# Altium PCB PCB_mounting.PcbDoc (part 4 of 4)
Units mm, origin at the board's own origin, x right, y up, seen from the top; angles counter-clockwise.
Board outline 75 x 100 mm, 4 copper layers (Top Layer, Int1 (GND), Int2 (PWR), Bottom Layer), stack 1.586 mm thick; 145 components, 97 nets, 660 pads, 380 vias.
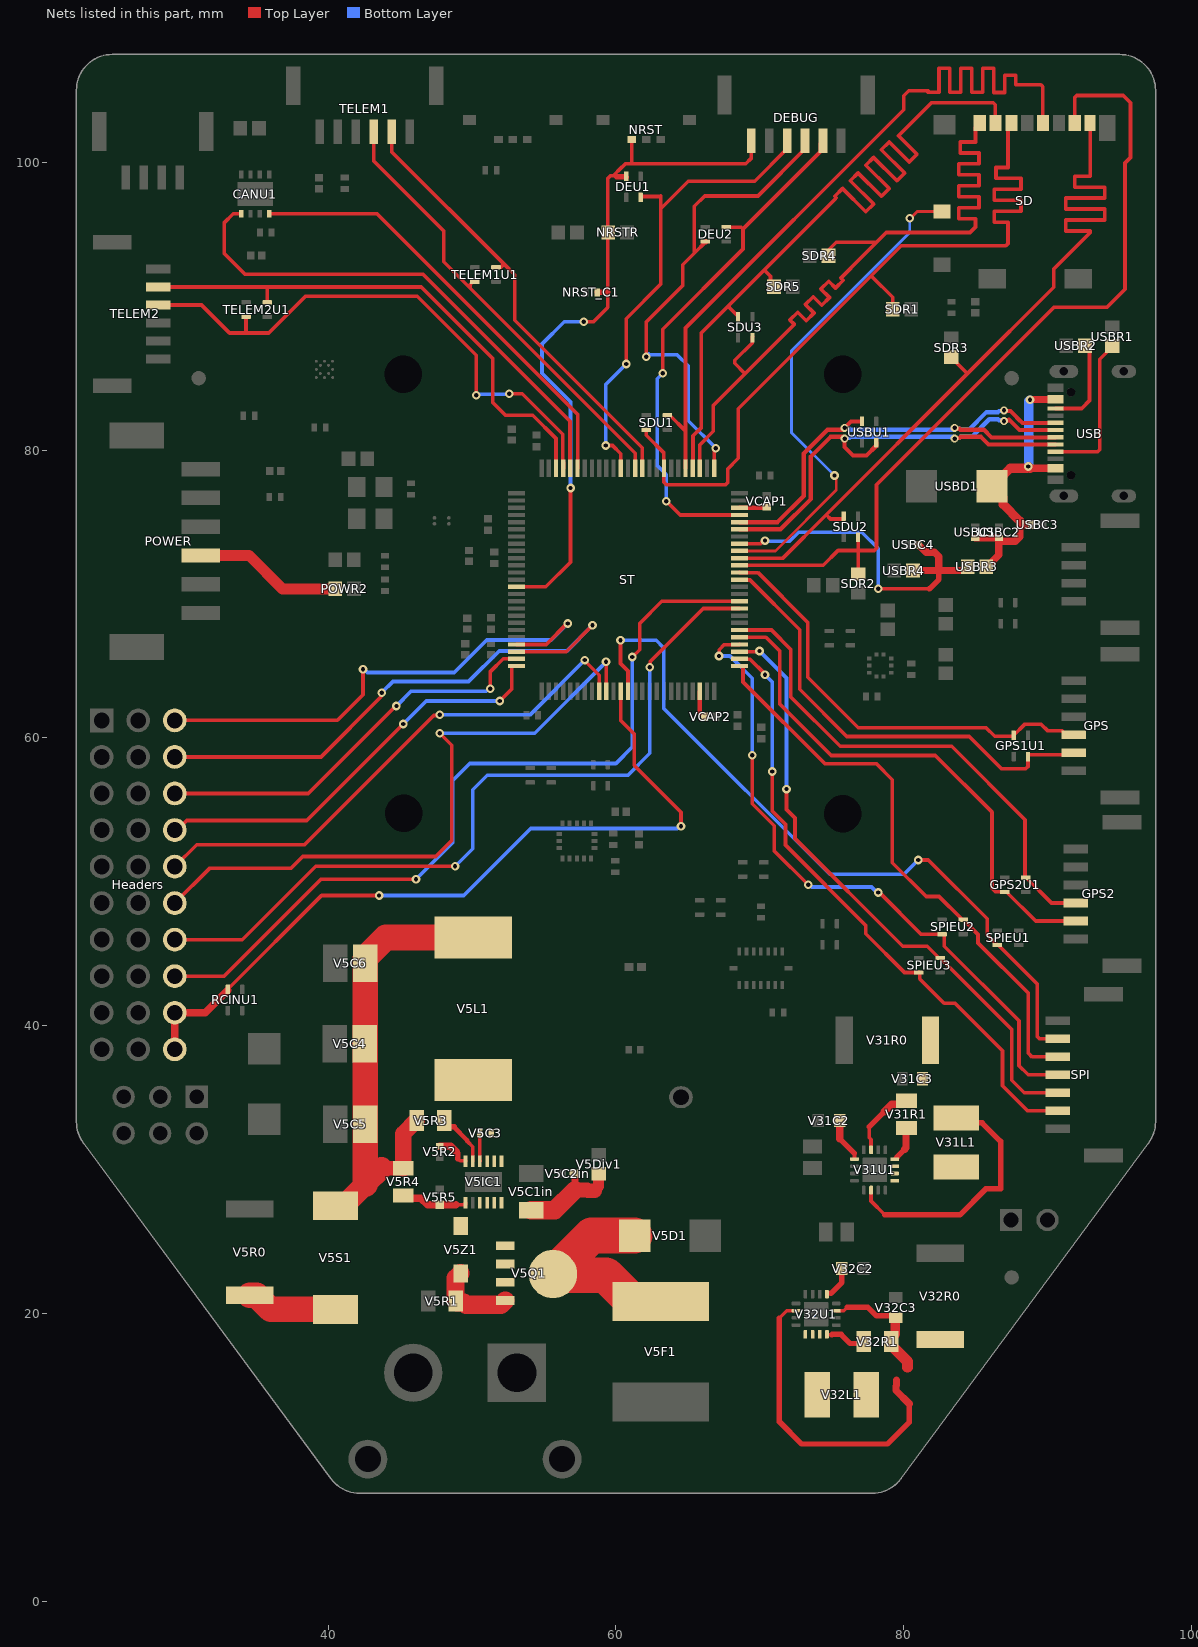
[diagram p5: the nets of this part, all layers, seen from the top]

## Via types
v1: diameter 0.6, hole 0.3, Top Layer to Bottom Layer, 358 vias
v2: diameter 0.5, hole 0.3, Top Layer to Bottom Layer, 10 vias
v3: diameter 1.27, hole 0.711, Top Layer to Bottom Layer, 6 vias
v4: diameter 0.55, hole 0.3, Top Layer to Bottom Layer, 6 vias

## Nets (pads, with @x,y where several pads share a name; then routed paths per layer and width w, separated by ;. In a path a pad name is that pad's centre, name@x,y a point inside that pad or via, vN(x,y) a via of type N, cw(c..) or ccw(c..) an arc to the next point about the centre after c; other vN are vias at no path point) (continued)
NetPOWER_4: POWER.4 POWR2.1 | length 10.3
  Top Layer w0.762: POWER.4@31.145,72.676 34.512,72.676 36.83,70.358 POWR2.1@40.498,70.358
NetST_48: ST.48 VCAP2.1 | length 1.9
  Top Layer w0.254: VCAP2.1@66.148,61.468 VCAP2.1@66.169,61.468
  Top Layer w0.3: ST.48@65.833,63.243 65.833,61.783 VCAP2.1@66.148,61.468
NetST_73: ST.73 VCAP1.1 | length 1.9
  Top Layer w0.3: ST.73@68.583,75.993 70.403,75.993 VCAP1.1@70.485,76.075
NetUSB_A4_B9: USB.A4_B9 USB.B4_A9 USBC1.1 USBC2.1 USBC3.1 USBD1.1 USBR3.1 | length 22.5
  Top Layer w0.508: USBC1.1@84.963,73.895 USBC2.1@86.614,73.895 ; USBR3.1@85.74,71.882 85.79,71.882 86.614,72.706 USBC2.1@86.614,73.895 ; v1@88.772,78.741 USB.A4_B9@90.551,78.741 ; v1(88.773,83.49) 88.799,83.515 90.525,83.515 USB.B4_A9@90.551,83.541 ; USBC3.1@88.9,74.803 88.329,74.803 88.075,75.057 88.075,74.803 88.075,73.978 87.757,73.66 86.849,73.66 USBC2.1@86.614,73.895
  Top Layer w0.635: USBD1.1@86.143,77.47 86.906,76.707 86.906,76.226 88.075,75.057 ; USBD1.1@86.143,77.52 86.906,78.283 86.956,78.283 87.406,78.733 88.537,78.733 v1(88.659,78.854) v1@88.772,78.741
  Bottom Layer w0.635: v1(88.659,78.854) 88.69,78.886 88.69,83.407 v1(88.773,83.49)
NetUSB_A5: USB.A5 USBR1.1 | length 10.7
  Top Layer w0.254: USB.A5@90.551,79.891 93.476,79.891 93.624,80.04 93.624,86.32 94.488,87.184 USBR1.1@94.488,87.234
NetUSB_B5: USB.B5 USBR2.1 | length 6.5
  Top Layer w0.254: USB.B5@90.551,82.891 92.365,82.891 92.913,83.439 92.913,86.934 USBR2.1@92.598,87.249
NetV5C1in_1: V5C1in.1 V5C2in.1 V5Div1.1 V5IC1.9 V5IC1.10 V5IC1.11 V5IC1.12 V5Q1.1 V5Q1.2 V5Q1.3 V5Z1.1 | length 7.5
  Top Layer w0.508: V5C2in.1@57.071,29.718 57.092,29.718 57.124,29.686 57.124,29.664 57.15,29.639 57.15,28.575
  Top Layer w0.762: 57.987,28.575 58.04,28.522 ; 58.505,28.522 58.801,28.818 V5Div1.1@58.801,29.703
  Top Layer w1.016: 57.15,28.575 57.987,28.575 ; 58.04,28.522 58.505,28.522
  Top Layer w1.27: V5C1in.1@54.102,27.172 55.747,27.172 57.15,28.575
NetV5C3_1: V5C3.1 V5IC1.4 | length 1.9
  Top Layer w0.254: V5C3.1@50.527,32.512 50.537,32.503 50.537,30.595 V5IC1.4@50.546,30.586
NetV5C3_2: V5C3.2 V5IC1.1 V5IC1.2 V5IC1.3 V5L1.1
NetV5C4_1: V5C4.1 V5C5.1 V5C6.1 V5L1.2 V5R3.2 V5R4.1 V5S1.2 | length 33.4
  Top Layer w1.016: 43.706,30.094 V5R4.1@45.212,30.094
  Top Layer w1.143: V5R4.1@45.212,30.094 45.212,32.491 46.122,33.401 V5R3.2@46.167,33.401
  Top Layer w1.524: V5S1.2@40.513,27.476 41.088,27.476 42.58,28.968 43.706,30.094
  Top Layer w1.778: 42.58,28.968 V5C5.1@42.58,33.147 42.562,33.164 42.562,38.718 V5C4.1@42.545,38.735 42.562,38.752 42.562,44.682 44.003,46.123 V5L1.2@50.089,46.123
NetV5D1_1: V5D1.1 V5F1.2 V5Q1.5-6-7-8 | length 15.1
  Top Layer w2.5: V5D1.1@61.304,25.4 58.293,25.4 V5Q1.5-6-7-8@55.626,22.733 55.709,22.65 59.307,22.65 61.129,20.828 V5F1.2@63.119,20.828
NetV5IC1_5: V5IC1.5 V5R3.1 | length 3.4
  Top Layer w0.254: 49.657,31.953 49.682,31.953 50.046,31.59 V5IC1.5@50.046,30.586
  Top Layer w0.3: 48.759,32.961 48.759,32.936 49.657,32.038 49.657,31.953
  Top Layer w0.381: V5R3.1@48.282,32.961 48.759,32.961
NetV5IC1_6: V5IC1.6 V5R2.1 | length 2.4
  Top Layer w0.254: 48.895,31.242 49.019,31.118 ; 49.019,30.755 49.167,30.607 49.525,30.607 V5IC1.6@49.546,30.586
  Top Layer w0.381: 49.019,30.755 49.019,31.118
  Top Layer w0.508: V5R2.1@47.752,31.623 48.514,31.623 48.895,31.242
NetV5IC1_7: V5IC1.7 V5R4.2 V5R5.1 | length 4.7
  Top Layer w0.254: 48.875,27.542 49.523,27.542 49.546,27.565 V5IC1.7@49.546,27.686
  Top Layer w0.508: V5R4.2@45.212,28.194 45.407,27.999 46.441,27.999 46.898,27.542 V5R5.1@47.752,27.542 48.875,27.542
NetV5Q1_4: V5Q1.4 V5R1.1 V5Z1.2 | length 5.8
  Top Layer w1.27: V5Z1.2@49.2,22.785 48.854,22.439 V5R1.1@48.854,20.853 48.944,20.763 49.434,20.763 49.598,20.599 52.016,20.599 V5Q1.4@52.314,20.897
NetV5R0_1: V5R0.1 V5S1.1 | length 6.4
  Top Layer w1.778: V5R0.1@34.544,21.257 35.016,21.257 35.997,20.276 V5S1.1@40.513,20.276
NetV31C2_1: V31C2.1 V31U1.9 | length 3.1
  Top Layer w0.254: V31U1.9@76.578,30.722 76.578,31.118
  Top Layer w0.381: 75.565,32.131 76.578,31.118
  Top Layer w0.508: V31C2.1@75.553,33.401 75.553,32.143 75.565,32.131
NetV31C3_1: V31C3.1 V31L1.2 V31R0.1 V31R1.2 V31U1.7 V31U1.14 | length 23.7
  Top Layer w0.254: 77.597,32.969 77.597,32.211 77.728,32.08 V31U1.7@77.728,31.372 ; V31U1.14@77.728,28.572 77.728,27.809 78.689,26.848 ; V31L1.2@83.642,33.577 V31L1.2@83.974,33.245
  Top Layer w0.381: 77.597,32.969 78.638,34.011 ; 78.689,26.848 83.896,26.848 85.7,28.651 86.741,28.651 86.741,31.953 85.449,33.245 V31L1.2@83.974,33.245
  Top Layer w0.508: 78.638,34.011 79.165,34.537 79.942,34.537 V31R1.2@80.188,34.783
  Top Layer w0.762: V31R0.1@81.648,37.85 81.867,38.069 V31R0.1@81.867,38.517
NetV31L1_1: V31L1.1 V31U1.1 V31U1.2 V31U1.3
NetV31R1_1: V31R1.1 V31U1.4 | length 2.5
  Top Layer w0.381: V31U1.4@79.488,30.787 79.553,30.853 79.553,30.889 80.061,31.397
  Top Layer w0.508: 80.061,31.397 80.162,31.499 V31R1.1@80.162,33.01
NetV32C2_1: V32C2.1 V32U1.9 | length 2.4
  Top Layer w0.279: V32U1.9@74.664,21.339 74.664,21.377 74.679,21.392 74.933,21.392
  Top Layer w0.381: 74.933,21.392 75.704,22.163 V32C2.1@75.704,23.114
NetV32C3_1: V32C3.1 V32L1.2 V32R0.1 V32R1.2 V32U1.7 V32U1.14 | length 30.8
  Top Layer w0.254: 71.349,19.66 71.878,20.189 V32U1.14@72.514,20.189 ; V32U1.7@75.314,20.189 75.84,20.189 76.073,20.422
  Top Layer w0.381: 71.349,19.66 71.349,12.471 72.898,10.922 78.867,10.922 80.391,12.446 80.391,13.716 ; 76.073,20.422 76.733,20.422 77.516,20.422 78.118,19.819 V32C3.1@79.328,19.819
  Top Layer w0.508: 79.502,15.367 79.502,14.986 79.468,14.952 79.468,14.639 80.391,13.716
  Top Layer w0.635: V32R1.2@79.121,18.034 79.121,18.259 79.412,18.55 79.412,19.657 V32C3.1@79.451,19.696 V32C3.1@79.328,19.819
  Top Layer w0.762: V32R1.2@79.121,18.034 79.121,17.809 80.264,16.666 80.264,16.256
NetV32L1_1: V32L1.1 V32U1.1 V32U1.2 V32U1.3
NetV32R1_1: V32R1.1 V32U1.4 | length 2.9
  Top Layer w0.254: V32U1.4@74.664,18.539 74.664,18.519 74.666,18.517 75.006,18.517
  Top Layer w0.381: 75.006,18.517 75.029,18.539 75.648,18.539 76.28,17.907 77.094,17.907 V32R1.1@77.221,18.034
NRST: DEBUG.6 DEU1.5 NRST.2 NRST_C1.1 NRSTR.1 ST.14 | length 50.2
  Top Layer w0.254: ST.14@53.083,70.493 55.126,70.493 56.845,72.212 v1(56.845,77.368) ; v1(57.76,88.925) 58.445,88.925 59.436,89.916 59.436,90.957 59.436,95.123 59.436,98.875 59.621,99.06 59.803,99.06 ; 59.99,99.06 59.803,99.06 ; NRST.2@61.103,101.585 61.102,99.898 ; DEBUG.6@69.392,101.484 69.392,100.261 69.029,99.898 61.102,99.898 ; 59.803,99.06 60.382,99.639 60.396,99.639 60.655,99.898 61.102,99.898
  Top Layer w0.381: NRST_C1.1@58.686,90.957 59.436,90.957 ; 59.99,99.06 60.043,99.008 60.68,99.008 DEU1.5@60.714,98.973
  Bottom Layer w0.254: v1(56.845,77.368) 56.845,83.363 54.864,85.344 54.864,87.376 56.413,88.925 v1(57.76,88.925)
PWM_1: Headers.3 ST.22 | length 35.5
  Top Layer w0.254: Headers.3@29.337,61.214 40.64,61.214 42.418,62.992 v1(42.418,64.757) ; ST.22@53.083,66.493 55.146,66.493 56.598,67.945 v1(56.642,67.945)
  Bottom Layer w0.254: v1(42.418,64.757) 42.512,64.757 42.728,64.541 48.768,64.541 51.029,66.802 55.499,66.802 v1(56.642,67.945)
PWM_2: Headers.6 ST.23 | length 39
  Top Layer w0.254: Headers.6@29.337,58.674 39.497,58.674 43.66,62.837 43.66,63.078 v1(43.726,63.144) ; ST.23@53.083,65.993 56.544,65.993 v1(58.369,67.818)
  Bottom Layer w0.254: v1(43.726,63.144) 44.501,63.919 49.759,63.919 51.88,66.04 56.591,66.04 v1(58.369,67.818)
PWM_3: Headers.9 ST.24 | length 28.3
  Top Layer w0.254: Headers.9@29.337,56.134 38.608,56.134 44.691,62.217 v1(44.742,62.217) ; v1(51.257,63.411) 51.273,63.427 51.273,64.608 52.158,65.493 ST.24@53.083,65.493
  Bottom Layer w0.254: v1(44.742,62.217) 45.758,63.233 50.986,63.233 51.164,63.411 v1(51.257,63.411)
PWM_4: Headers.12 ST.25 | length 29.4
  Top Layer w0.254: Headers.12@29.337,53.594 29.511,53.594 30.172,54.254 38.506,54.254 v1(45.212,60.96) ; v1(51.918,62.56) 52.756,63.398 52.756,64.97 52.779,64.993 ST.25@53.083,64.993
  Bottom Layer w0.254: v1(45.212,60.96) 46.812,62.56 v1(51.918,62.56)
PWM_5: Headers.15 ST.34 | length 37
  Top Layer w0.254: Headers.15@29.337,51.054 30.861,52.578 38.354,52.578 47.334,61.558 47.715,61.558 v1(47.752,61.595) ; v1(57.836,65.405) 57.836,65.354 58.833,64.357 ST.34@58.833,63.243
  Bottom Layer w0.254: v1(47.752,61.595) 54.026,61.595 v1(57.836,65.405)
PWM_6: Headers.18 ST.35 | length 44.5
  Top Layer w0.254: Headers.18@29.337,48.514 31.75,50.927 37.401,50.927 38.227,51.752 47.473,51.752 48.59,52.87 48.59,59.487 v1(47.752,60.325) ; v1(59.309,65.278) 59.333,65.254 ST.35@59.333,63.243
  Bottom Layer w0.254: v1(47.752,60.325) 54.356,60.325 v1(59.309,65.278)
PWM_7: Headers.21 ST.59 | length 54.9
  Top Layer w0.254: Headers.21@29.337,45.974 34.036,45.974 39.141,51.079 v1(48.819,51.079) ; v1(62.357,64.897) 62.394,64.934 62.394,65.315 66.072,68.993 ST.59@68.583,68.993
  Bottom Layer w0.254: v1(48.819,51.079) 48.831,51.079 50.038,52.286 50.038,56.388 51.054,57.404 60.833,57.404 62.357,58.928 v1(62.357,64.897)
PWM_8: Headers.24 ST.60 | length 57.3
  Top Layer w0.254: Headers.24@29.337,43.434 32.766,43.434 39.497,50.165 v1(46.101,50.165) ; v1(61.138,65.621) 61.646,66.129 61.646,67.955 63.184,69.493 ST.60@68.583,69.493
  Bottom Layer w0.254: v1(46.101,50.165) 48.641,52.705 48.641,57.023 49.835,58.217 59.995,58.217 61.138,59.36 v1(61.138,65.621)
RCIN_SBUS: Headers.27 Headers.30 RCINU1.5 ST.37 | length 54.3
  Top Layer w0.254: RCINU1.5@33.028,42.458 33.051,42.481 33.051,42.556 39.542,49.047 v1(43.536,49.047) ; ST.37@60.333,63.243 60.333,61.206 61.265,60.274 61.265,58.085 64.516,54.834 v1(64.516,53.848)
  Top Layer w0.508: Headers.30@29.337,38.354 Headers.27@29.337,40.894 31.464,40.894 RCINU1.5@33.028,42.458
  Bottom Layer w0.254: v1(43.536,49.047) 49.428,49.047 54.077,53.696 64.27,53.696 64.422,53.848 v1(64.516,53.848)
RX_CAN: CANU1.4 ST.95 | length 31
  Top Layer w0.254: CANU1.4@35.9,96.428 43.399,96.428 57.333,82.494 ST.95@57.333,78.743
SD_GPIO: SD.9 ST.67 | length 34.6
  Top Layer w0.2: ST.67@68.583,72.993 71.088,72.993 75.311,77.216 75.311,78.232 v1(75.184,78.232) ; v1(80.416,96.114) 80.47,96.114 80.938,96.582 SD.9@82.652,96.582
  Bottom Layer w0.2: v1(75.184,78.232) 72.187,81.229 72.187,86.893 80.416,95.123 v1(80.416,96.114)
SDMMC_CK: SD.5 SDU1.5 ST.80 | length 58.3
  Top Layer w0.254: SDU1.5@63.667,82.415 63.742,82.415 64.833,81.324 64.833,81.28 ; ST.80@64.833,78.743 64.833,81.28 ; SD.5@89.687,102.732 89.662,102.757 89.662,105.262 89.576,105.348 89.528,105.396 89.525,105.396 89.449,105.396 87.782,105.399 87.782,106.055 87.02,106.055 87.02,104.856 86.258,104.856 86.258,106.536 85.496,106.536 85.496,104.858 84.734,104.858 84.734,106.538 83.972,106.538 83.972,104.861 83.21,104.861 83.21,106.541 82.448,106.541 82.448,104.863 81.686,104.863 81.686,104.973 80.924,104.973 80.924,104.965 80.797,104.965 80.348,104.965 80.01,104.627 80.01,103.657 64.833,88.48 64.833,81.28
SDMMC_CMD: SD.3 SDR1.2 SDU1.3 ST.83 | length 58.3
  Top Layer w0.254: SDU1.3@62.054,81.415 62.073,81.415 62.096,81.392 62.096,81.033 63.333,79.796 ST.83@63.333,78.743 63.333,77.764 63.5,77.597 67.618,77.597 67.767,77.746 67.767,78.689 68.504,79.426 68.504,82.88 77.673,92.05 ; SDR1.2@79.233,89.789 79.233,90.617 77.8,92.05 77.673,92.05 ; SD.3@87.487,102.732 87.249,102.494 87.249,100.711 87.249,99.644 86.415,99.644 86.415,98.882 88.155,98.882 88.155,98.12 86.293,98.12 86.293,97.358 88.155,97.358 88.155,96.596 86.293,96.596 86.293,95.834 87.249,95.834 87.249,95.707 87.249,94.357 87.1,94.209 79.832,94.209 77.673,92.05
SDMMC_D0: SD.7 SDR2.2 SDU2.5 ST.65 | length 59
  Top Layer w0.254: ST.65@68.583,71.993 74.406,71.993 75.438,73.025 76.867,73.025 ; SDU2.5@76.827,74.001 76.827,73.065 76.867,73.025 ; SDR2.2@76.835,71.374 76.835,72.993 76.867,73.025 ; SD.7@91.887,102.732 91.887,104.5 92.035,104.648 95.25,104.648 95.758,104.14 95.758,100.33 95.377,99.949 95.377,91.186 94.107,89.916 90.424,89.916 78.105,77.597 78.105,73.173 77.957,73.025 76.867,73.025
SDMMC_D1: SD.8 SDR3.2 SDU2.3 ST.66 | length 58.3
  Top Layer w0.254: ST.66@68.583,72.493 71.604,72.493 74.612,75.501 ; SDU2.3@75.827,75.411 75.827,75.232 75.804,75.209 74.905,75.209 74.612,75.501 ; SDR3.2@83.312,86.472 83.312,86.422 84.391,85.342 84.391,85.281 ; SD.8@92.937,102.732 92.964,102.705 92.964,99.343 92.964,99.039 91.887,99.039 91.887,98.277 93.97,98.277 93.97,97.515 91.263,97.515 91.263,96.753 93.97,96.753 93.97,95.991 91.263,95.991 91.263,95.229 92.964,95.229 92.964,95.123 92.943,95.102 90.424,92.583 90.424,91.313 84.391,85.281 ; 74.612,75.501 84.391,85.281
SDMMC_D2: SD.1 SDR4.2 SDU3.5 ST.78 | length 58.3
  Top Layer w0.254: ST.78@65.833,78.743 65.833,80.375 66.764,81.305 66.764,83.096 68.974,85.306 ; SDU3.5@69.486,87.869 69.463,87.846 69.463,87.447 68.253,86.237 68.253,86.026 68.974,85.306 ; SDR4.2@74.574,93.447 74.574,93.699 75.313,94.437 78.105,94.437 ; SD.1@85.287,102.732 84.989,102.434 84.989,101.879 84.989,101.414 83.929,101.414 83.929,100.652 85.23,100.652 85.23,99.89 83.818,99.89 83.818,99.128 85.23,99.128 85.23,98.366 83.818,98.366 83.818,97.604 85.23,97.604 85.23,96.842 83.818,96.842 83.818,96.08 84.989,96.08 84.989,95.953 84.989,95.505 84.607,95.123 78.791,95.123 78.105,94.437 ; 68.974,85.306 72.311,88.643 72.401,88.733 72.087,89.048 72.626,89.586 73.229,88.983 73.768,89.522 73.164,90.125 73.703,90.664 74.306,90.061 74.845,90.6 74.242,91.203 74.781,91.742 75.255,91.267 75.794,91.806 75.634,91.966 77.071,93.404 78.105,94.437
SDMMC_D3: SD.2 SDR5.2 SDU3.3 ST.79 | length 58.3
  Top Layer w0.254: ST.79@65.333,78.743 65.356,78.766 65.356,80.99 65.938,81.572 65.938,88.151 67.862,90.075 ; SDU3.3@68.486,89.219 68.486,89.294 67.862,89.918 67.862,90.075 ; SDR5.2@70.978,91.351 70.743,91.586 70.743,92.083 70.307,92.519 ; SD.2@86.387,102.732 86.36,102.759 86.36,103.992 86.212,104.14 81.928,104.14 80.483,102.695 79.629,101.841 80.916,100.554 80.378,100.015 78.984,101.408 78.445,100.869 80.063,99.251 79.525,98.712 77.907,100.33 77.368,99.792 78.986,98.174 78.447,97.635 76.829,99.253 76.29,98.714 77.908,97.096 77.369,96.557 75.751,98.175 75.213,97.636 75.318,97.531 75.228,97.441 70.307,92.519 ; 67.862,90.075 70.307,92.519
SPI_EXT_MISO: SPI.3 SPIEU3.5 ST.53 | length 43.1
  Top Layer w0.254: ST.53@68.583,65.993 69.93,65.993 v1(69.977,66.04) ; v1(71.857,56.439) 71.857,55.016 72.441,54.432 72.441,53.01 79.934,45.517 81.642,45.517 82.365,44.794 82.365,44.719 82.388,44.696 SPIEU3.5@82.463,44.696 ; SPIEU3.5@82.538,44.696 87.503,39.731 87.503,36.195 88.372,35.326 SPI.3@90.689,35.326
  Bottom Layer w0.254: v1(69.977,66.04) 71.857,64.16 v1(71.857,56.439)
SPI_EXT_MOSI: SPI.4 SPIEU2.3 ST.54 | length 46
  Top Layer w0.254: v1(67.158,65.684) 67.169,65.696 67.169,66.128 67.511,66.47 68.56,66.47 ST.54@68.583,66.493 ; v1(69.469,58.801) 69.469,55.423 71.006,53.886 71.006,52.133 v1(73.355,49.784) ; v1(78.232,49.251) 78.308,49.251 81.204,46.355 82.799,46.355 82.822,46.332 82.822,45.524 88.011,40.335 88.011,37.211 88.646,36.576 SPI.4@90.689,36.576
  Bottom Layer w0.254: v1(67.158,65.684) 67.92,65.684 69.469,64.135 v1(69.469,58.801) ; v1(73.355,49.784) 73.449,49.784 73.601,49.632 77.757,49.632 78.138,49.251 v1(78.232,49.251)
SPI_EXT_SCK: SPI.2 SPIEU3.3 ST.52 | length 43.3
  Top Layer w0.254: ST.52@68.583,65.493 68.606,65.47 69.318,65.47 70.358,64.43 v1(70.358,64.389) ; v1(70.866,57.658) 70.866,54.915 71.78,54 71.78,52.553 77.368,46.965 77.368,46.38 80.053,43.696 81.113,43.696 81.113,43.245 82.804,41.554 83.566,41.554 86.868,38.252 86.868,35.814 88.606,34.076 SPI.2@90.689,34.076
  Bottom Layer w0.254: v1(70.358,64.389) 70.866,63.881 v1(70.866,57.658)
SPI_EXT_SS1: SPI.5 SPIEU2.5 ST.51 | length 40.2
  Top Layer w0.254: ST.51@68.583,64.993 68.811,64.993 68.834,64.97 68.834,63.881 74.524,58.191 78.105,58.191 79.21,57.087 79.21,51.321 81.559,48.971 82.458,48.971 83.976,47.453 83.976,47.378 83.999,47.355 84.074,47.355 84.149,47.355 85.166,46.338 85.166,45.745 88.646,42.266 88.646,38.1 88.92,37.826 SPI.5@90.689,37.826
SPI_EXT_SS2: SPI.6 SPIEU1.5 ST.38 | length 51.6
  Top Layer w0.254: v1(60.312,66.777) 60.312,65.164 60.833,64.643 ST.38@60.833,63.243 ; v1(81.013,51.511) 81.712,51.511 85.798,47.425 85.798,46.302 86.499,45.601 SPIEU1.5@86.574,45.601 ; SPIEU1.5@86.649,45.601 86.672,45.578 86.672,45.503 89.281,42.894 89.281,39.243 89.448,39.076 SPI.6@90.689,39.076
  Bottom Layer w0.254: v1(60.312,66.777) 62.801,66.777 63.309,66.269 63.309,62.065 74.854,50.521 80.023,50.521 v1(81.013,51.511)
SWCLK: DEBUG.3 DEU2.5 ST.76 | length 34.1
  Top Layer w0.254: v1(62.103,86.487) 62.103,88.9 64.643,91.44 64.643,92.879 65.449,93.685 ; DEU2.5@66.254,94.49 65.449,93.685 ; ST.76@66.833,78.743 66.833,79.947 66.929,80.043 v1(66.929,80.137) ; DEBUG.3@73.142,100.934 69.871,97.663 66.167,97.663 65.449,96.945 65.449,93.685
  Top Layer w0.381: DEU2.5@66.254,94.49 DEU2.5@66.254,94.496 ; DEBUG.3@73.142,100.934 DEBUG.3@73.142,101.484
  Bottom Layer w0.254: v1@62.23,86.614 64.262,86.614 65.024,85.852 65.024,82.042 v1(66.929,80.137)
  Bottom Layer w0.381: v1(62.103,86.487) v1@62.23,86.614
SWDIO: DEBUG.2 DEU2.3 ST.72 | length 36.8
  Top Layer w0.254: v1(63.246,85.344) 63.246,88.392 68.834,93.98 68.834,95.361 ; v1(63.5,76.454) 64.461,75.493 ST.72@68.583,75.493 ; DEU2.3@67.604,95.496 68.699,95.496 68.834,95.361 ; DEBUG.2@74.286,101.378 74.219,101.311 74.219,100.746 68.834,95.361
  Top Layer w0.381: DEBUG.2@74.286,101.378 DEBUG.2@74.392,101.484
  Bottom Layer w0.254: v1(63.246,85.344) 62.865,84.963 62.865,78.93 63.5,78.295 v1(63.5,76.454)
SWDO: DEBUG.4 DEU1.3 ST.89 | length 33.6
  Top Layer w0.254: v1(59.284,80.315) 59.766,80.315 60.333,79.748 ST.89@60.333,78.743 ; v1(60.706,85.979) 60.706,89.129 63.119,91.542 63.119,96.774 ; DEU1.3@61.714,97.623 63.079,97.623 ; 63.119,97.663 63.119,96.774 ; DEBUG.4@71.892,100.934 69.637,98.679 65.024,98.679 63.119,96.774
  Top Layer w0.381: DEBUG.4@71.892,100.934 DEBUG.4@71.892,101.484
  Bottom Layer w0.254: v1(59.284,80.315) 59.284,84.557 v1(60.706,85.979)
TX_CAN: CANU1.1 ST.96 | length 35.7
  Top Layer w0.254: CANU1.1@33.95,96.428 33.41,96.428 32.766,95.783 32.766,93.675 34.214,92.227 46.584,92.227 56.81,82.002 56.81,79.336 56.81,78.766 ST.96@56.833,78.743
UART_1_RX: GPS1U1.5 GPS.3 ST.64 | length 30.8
  Top Layer w0.254: ST.64@68.583,71.493 68.59,71.486 69.865,71.486 73.33,68.021 73.33,64.211 76.835,60.706 85.725,60.706 86.32,60.111 GPS1U1.5@87.638,60.111 ; GPS1U1.5@87.638,60.186 88.387,60.935 89.56,60.935 89.992,60.503 90.987,60.503 91.282,60.208 GPS.3@91.832,60.208
UART_1_TX: GPS1U1.3 GPS.2 ST.63 | length 32
  Top Layer w0.254: ST.63@68.583,70.993 68.606,70.97 69.318,70.97 72.771,67.517 72.771,63.373 76.048,60.096 84.557,60.096 86.792,57.861 88.489,57.861 88.638,58.01 GPS1U1.3@88.638,58.761 ; GPS1U1.3@88.638,58.836 91.71,58.836 GPS.2@91.832,58.958
UART_2_RX: ST.87 TELEM1.3 TELEM1U1.5 | length 31.6
  Top Layer w0.254: TELEM1.3@43.17,102.119 43.17,100.086 48.031,95.225 48.031,93.086 49.796,91.321 49.874,91.244 61.341,79.776 61.341,78.751 ST.87@61.333,78.743 ; 49.884,91.254 49.884,91.53 49.984,91.631 49.984,91.679 50.007,91.702 TELEM1U1.5@50.192,91.702
UART_2_TX: ST.86 TELEM1.2 TELEM1U1.3 | length 31.2
  Top Layer w0.254: TELEM1.2@44.42,102.119 44.42,100.718 52.211,92.927 ; TELEM1U1.3@51.662,92.702 51.685,92.725 52.009,92.725 52.211,92.927 ; ST.86@61.833,78.743 61.833,80.153 52.959,89.027 52.959,92.179 52.211,92.927
UART_3_RX: GPS2.3 GPS2U1.5 ST.56 | length 35.5
  Top Layer w0.254: ST.56@68.583,67.493 70.81,67.493 72.136,66.167 72.136,62.865 75.59,59.411 83.337,59.411 88.432,54.316 GPS2U1.5@88.432,50.284 ; GPS2U1.5@88.507,50.284 90.267,48.524 GPS2.3@91.959,48.524
UART_3_TX: GPS2.2 GPS2U1.3 ST.55 | length 36.8
  Top Layer w0.254: ST.55@68.583,66.993 70.421,66.993 71.374,66.04 71.374,62.357 74.955,58.776 82.194,58.776 86.131,54.839 86.131,49.555 86.38,49.307 87.134,49.307 89.167,47.274 GPS2.2@91.959,47.274
UART_4_RX: ST.97 TELEM2.3 TELEM2U1.5 | length 39.2
  Top Layer w0.254: TELEM2.3@28.194,90.083 31.202,90.083 33.147,88.138 34.227,88.138 ; TELEM2U1.5@34.292,89.264 34.292,88.203 34.227,88.138 ; v1(50.292,83.82) 50.292,86.589 46.19,90.691 38.417,90.691 35.865,88.138 34.227,88.138 ; v1(52.578,83.922) 53.492,83.922 56.31,81.104 56.31,79.194 56.356,79.148 56.356,78.74 56.336,78.74 ST.97@56.333,78.743
  Bottom Layer w0.254: v1(50.292,83.82) 50.343,83.871 52.527,83.871 v1(52.578,83.922)
UART_4_TX: ST.98 TELEM2.2 TELEM2U1.3 | length 36.9
  Top Layer w0.254: TELEM2.2@28.194,91.333 35.738,91.333 ; TELEM2U1.3@35.762,90.264 35.762,91.309 35.738,91.333 ; ST.98@55.833,78.743 55.833,80.812 54.222,82.423 52.324,82.423 51.435,83.312 51.435,86.36 46.462,91.333 35.738,91.333
USB_Detect: ST.68 USBC4.1 USBR3.2 USBR4.1 | length 25
  Top Layer w0.254: ST.68@68.583,73.493 70.047,73.493 70.264,73.711 v1(70.358,73.711) ; v1(78.232,70.358) 81.788,70.358
  Top Layer w0.381: 81.788,70.358 82.438,71.008 82.438,71.628
  Top Layer w0.508: USBR4.1@80.645,71.628 82.438,71.628 ; USBC4.1@81.045,73.406 81.553,72.898 82.141,72.898 82.438,72.6 82.438,71.628 ; USBR3.2@84.44,71.882 84.44,71.857 84.219,71.636 83.929,71.636 83.921,71.628 82.438,71.628
  Bottom Layer w0.254: v1(70.358,73.711) 70.409,73.66 72.06,73.66 72.695,74.295 77.089,74.295 78.232,73.152 v1(78.232,70.358)
USB_OTG_FS_N: ST.70 USB.A7 USB.B7 USBU1.3 | length 38.3
  Top Layer w0.286: ST.70@68.583,74.493 68.588,74.498 71.431,74.498 73.54,76.607 73.54,79.553 74.911,80.924 75.717,80.924 75.849,80.793 v4(75.895,80.793) 75.895,80.213 76.479,79.629 77.419,79.629 78.09,80.3 78.09,80.513 USBU1.3@78.097,80.52 ; v4(83.541,80.793) 83.601,80.853 83.879,80.853 83.951,80.924 85.369,80.924 85.897,80.396 90.546,80.396 USB.B7@90.551,80.391 ; v4(86.97,82.012) 87.03,82.072 87.267,82.072 87.316,82.121 88.041,81.396 90.546,81.396 USB.A7@90.551,81.391
  Bottom Layer w0.286: v4(75.895,80.793) 75.955,80.853 76.234,80.853 76.305,80.924 83.409,80.924 v4(83.541,80.793) 83.601,80.853 83.879,80.853 83.951,80.924 84.725,80.924 85.945,82.144 86.559,82.144 86.631,82.072 86.91,82.072 v4(86.97,82.012)
USB_OTG_FS_P: ST.71 USB.A6 USB.B6 USBU1.5 | length 36.2
  Top Layer w0.286: ST.71@68.583,74.993 68.588,74.988 71.228,74.988 73.05,76.81 73.05,79.755 74.709,81.414 75.717,81.414 75.849,81.545 v4(75.895,81.545) 76.34,81.99 USBU1.5@77.097,81.99 ; v4(83.541,81.545) 83.601,81.485 83.879,81.485 83.951,81.414 85.572,81.414 86.071,80.915 86.1,80.886 90.546,80.886 USB.A6@90.551,80.891 ; v4(86.97,82.764) 87.03,82.704 87.425,82.704 87.662,82.467 87.986,82.144 88.244,81.886 90.546,81.886 USB.B6@90.551,81.891
  Bottom Layer w0.286: v4(75.895,81.545) 75.955,81.485 76.234,81.485 76.305,81.414 83.409,81.414 v4(83.541,81.545) 83.601,81.485 83.879,81.485 83.951,81.414 84.523,81.414 85.742,82.633 86.559,82.633 86.631,82.704 86.91,82.704 v4(86.97,82.764)
pads on no net: BMIU1.1 BMIU2.1 BMIU3.1 BOOT.2 DEU1.1 DEU2.1 GPS1U1.1 GPS2U1.1 I2CEU1.1 I2CU1.1 ICMU1.1 ICMU2.1 IM1.7 IM2.1 IM2.13 NRST.1 RCINU1.1 RCINU1.3 SDU1.1 SDU2.1 SDU3.1 SPIEU1.1 SPIEU1.3 SPIEU2.1 SPIEU3.1 ST.1 ST.2 ST.3 ST.4 ST.9 ST.13 ST.18 ST.33 ST.36 ST.57 ST.58 ST.61 ST.62 ST.69 ST.77 ST.81 ST.82 ST.84 ST.85 ST.88 ST.90 TELEM1.4 TELEM1.5 TELEM1U1.1 TELEM2.4 TELEM2.5 TELEM2U1.1 USB. USB.A8 USB.B8 USBU1.1 V31U1.17@77.978,29.972 V32U1.17@73.914,19.939

## Polygon pours and split planes (outlines as drawn)
GND on Top Layer "GND_L01_P070" (solid, pour order 70): 73.431,19.837 73.431,19.177 73.381,19.126 73.318,19.189 72.839,19.189 72.839,19.143 72.695,18.999 72.695,16.485 71.882,16.485 71.882,19.482 71.907,19.482 72.238,19.812
GND on Top Layer "GND_L01_P069" (solid, pour order 69): 74.637,19.689 74.76,19.812 77.445,19.812 77.47,19.837 77.47,19.05 74.93,19.05 74.752,19.228 74.625,19.228
GND on Top Layer "GND_L01_P067" (solid, pour order 67): 83.693,27.508 83.566,27.381 78.943,27.381 78.08,28.245 78.08,29.347 78.728,29.347 78.728,28.739 79.045,28.423 79.07,28.448 83.718,28.448
GND on Top Layer "GND_L01_P068" (solid, pour order 68): 78.867,30.62 78.867,32.829 78.105,32.829 78.105,30.594
+5 on Top Layer "+5_L01_P011" (solid, pour order 11): 34.417,34.544 36.703,34.544 36.703,28.194 36.195,27.686 36.195,26.67 33.02,26.67 32.893,26.543 32.893,23.114 31.09,23.114 27.407,26.797 27.407,30.988 31.75,30.988 33.401,32.639
GND on Top Layer "GND_L01_P058" (solid, pour order 58): 75.692,26.365 79.172,26.365 79.959,25.578 79.959,20.752 78.105,20.752 76.784,22.073 76.784,23.8 75.59,24.994 75.616,25.019 75.616,26.289
NetV31L1_1 on Top Layer "NETV31L1_1_L01_P066" (solid, pour order 66): 79.096,30.328 80.569,30.328 81.305,31.064 85.242,31.064 85.242,29.337 85.014,29.108 79.07,29.108
"+3V3 Sens" on Top Layer "+3V3_SENS_L01_P065" (solid, pour order 65): 80.848,23.622 80.874,23.647 80.874,25.019 81.407,25.552 83.668,25.552 85.573,27.457 88.417,27.457 88.417,25.476 86.766,25.476 84.887,23.597 83.566,23.597
GND on Top Layer "Top Layer-GND" (solid, pour order 64): 76.835,35.712 76.835,35.75 77.838,36.754 80.289,36.754 80.289,35.839 80.264,35.814 79.121,35.814 78.156,34.849 74.905,34.849 74.447,34.392 74.447,31.217 74.371,31.14 71.78,31.14 70.485,29.845 70.485,10.033 67.945,10.033 67.945,23.495 67.056,24.384 65.151,24.384 65.151,26.416 63.754,27.813 60.325,27.813 60.071,28.067 60.071,32.385 69.291,32.385 72.619,35.712
NetV31C3_1 on Top Layer "NETV31C3_1_L01_P062" (solid, pour order 62): 81.28,40.665 82.474,40.665 82.474,40.538 85.128,37.884 85.128,32.829 82.105,32.829 82.093,32.817 81.712,33.198 81.712,33.909 81.28,33.909 80.924,34.265 79.426,34.265 79.426,35.23 79.502,35.306 80.899,35.306 80.899,36.728 81.255,37.084 81.255,37.414
GND on Top Layer "GND_L01_P054" (solid, pour order 54): 56.515,29.439 55.321,29.439 55.042,29.159 53.742,29.159 53.73,29.147 52.692,30.62 52.692,32.601 53.746,33.655 53.746,47.803 53.53,48.019 44.717,48.019 44.323,47.625 42.647,47.625 41.262,46.241 41.262,31.89 41.288,31.864 41.161,31.737 41.161,29.477 38.443,29.477 37.224,30.696 37.224,34.963 31.712,34.963 31.128,36.995 31.128,39.535 31.813,40.221 34.658,40.221 35.42,40.983 35.42,44.082 39.51,48.171 43.878,48.171 45.237,49.53 52.375,49.53 53.175,48.73 58.737,48.73 59.957,47.511 59.957,35.496 56.515,32.055
"+3V3 Core" on Top Layer "+3V3_CORE_L01_P057" (solid, pour order 57): 76.53,36.449 76.53,40.564 78.105,40.564 80.023,42.481 77.622,44.882 76.149,44.882 74.498,43.231 74.498,41.631 71.831,39.599 69.748,39.599 64.262,39.599 62.687,38.024 62.687,33.503 69.266,33.503 72.212,36.449
+5 on Top Layer "+5_L01_P056" (solid, pour order 56): 32.512,79.223 32.537,79.197 32.537,76.2 29.997,76.2 29.566,76.632 28.016,76.632 27.61,76.225 27.61,73 23.952,73 23.952,79.273 29.87,79.273
+5 on Top Layer "Top Layer-+5" (solid, pour order 32): 71.247,20.574 72.771,20.574 72.771,21.082 74.295,21.082 74.295,22.225 74.041,22.733 73.965,23.8 73.914,24.892 75.057,24.892 75.057,26.416 75.489,26.848 77.343,27.561 77.343,28.829 76.962,28.829 76.835,28.956 76.835,30.353 75.311,30.353 75.057,30.607 72.517,30.607 71.247,29.337 71.247,26.035
GND on Top Layer "GND_L01_P055" (solid, pour order 55): 48.082,31.064 47.346,31.064 47.346,30.734 46.584,29.972 46.584,28.804 47.092,28.296 48.387,28.296 48.717,28.626 48.717,28.727 49.784,28.727 49.911,28.854 49.911,29.515 49.174,29.515 48.082,30.607
GND on Top Layer "GND_L01_P053" (solid, pour order 53): 44.196,26.899 44.221,26.873 47.117,26.873 47.396,26.594 47.396,18.669 48.514,18.669 48.92,18.263 48.92,8.516 43.376,8.516 36.068,15.824 36.068,17.983 43.129,17.983 43.79,18.644 43.79,26.568
GND on Top Layer "GND_L01_P043" (solid, pour order 43): 56.236,52.476 56.388,52.324 56.388,51.943 58.293,51.943 58.42,51.816 58.42,49.911 54.737,49.911 54.483,50.165 54.483,52.476
NetV5C3_2 on Top Layer "NETV5C3_2_L01_P044" (solid, pour order 44): 47.422,37.694 47.447,37.668 52.832,37.668 52.832,33.401 52.222,32.791 52.222,30.175 50.825,30.175 50.825,30.963 50.876,31.445 50.927,32.995 49.174,34.747 47.396,34.747
NetV32C3_1 on Top Layer "NETV32C3_1_L01_P029" (solid, pour order 29): 76.581,15.875 76.708,16.002 78.359,16.002 79.689,17.332 80.899,17.399 80.899,18.745 84.201,18.745 84.201,17.526 79.375,12.827 78.105,12.827 76.581,12.827
NetV32L1_1 on Top Layer "NETV32L1_1_L01_P028" (solid, pour order 28): 73.025,18.796 74.295,18.796 74.295,16.51 74.93,15.875 74.93,12.7 73.025,12.7
NetV5C1in_1 on Top Layer "NETV5C1IN_1_L01_P007" (solid, pour order 7): 52.959,21.844 51.054,21.844 51.054,24.384 49.936,25.502 48.768,25.502 48.768,26.746 50.368,26.746 50.419,26.797 50.419,28.118 52.273,28.118 52.578,27.813 54.864,27.813 54.991,27.686 54.991,26.67 53.975,26.67 52.959,25.654 52.959,25.146
"BAT (6-36)V" on Top Layer "BAT_(6-36)V_L01_P001" (solid, pour order 1): 50.622,17.843 51.346,18.567 56.401,18.567 59.499,15.469 66.484,15.469 66.484,12.421 55.944,12.421 55.181,13.183 50.622,13.183
+5 on Int2 (PWR) "Int2 (PWR)-+5" (solid, pour order 41): 101.6,23.241 98.819,23.241 79.375,3.797 36.335,3.797 17.78,22.352 18.288,92.837 19.177,92.837 19.177,112.522 100.584,112.522 103.124,109.982 101.6,108.458
"+3V3 Core" on Int2 (PWR) "+3V3_CORE_L03_P039" (solid, remove dead copper, pour order 39): 86.36,30.557 86.36,37.452 89.37,40.462 89.37,53.061 86.22,56.21 86.22,72.834 82.207,72.834 82.207,65.938 73.774,65.938 73.774,60.693 72.704,59.623 72.704,55.169 74.968,55.169 76.746,53.391 82.677,53.391 82.677,51.13 78.295,46.749 74.447,46.749 74.447,43.269 70.955,39.776 67.564,39.776 62.89,44.45 62.89,50.825 59.08,50.825 55.677,47.422 42.951,47.422 42.685,47.688 42.697,47.701 42.697,51.257 44.31,51.257 47.777,54.724 47.777,58.966 46.926,58.966 46.177,59.715 44.45,59.715 40.957,63.208 40.957,65.494 41.402,65.938 48.971,65.938 52.349,69.317 52.349,75.133 51.93,75.552 50.952,75.552 49.53,76.975 49.53,79.654 49.543,79.654 50.482,80.594 52.946,80.594 52.946,81.978 52.261,82.664 49.606,82.664 49.606,82.702 49.39,82.918 49.39,84.43 54.724,89.764 64.11,89.764 66.23,87.643 66.23,82.156 68.567,79.819 68.567,76.733 71.044,76.733 71.044,86.919 78.854,94.729 78.854,97.091 81.953,97.091 81.953,93.447 77.14,88.633 77.14,83.007 81.077,83.007 89.497,91.427 89.497,97.98 88.113,99.365 43.612,99.365 35.636,91.389 35.636,32.791 37.859,30.569 83.947,30.569
GND on Int2 (PWR) "GND_L03_P040" (solid, pour order 40): 48.857,90.576 67.424,90.576 74.727,97.879 83.757,97.879 89.37,92.266 89.37,90.449 90.284,89.535 90.284,53.2 88.316,53.2 88.189,53.327 76.416,41.554 76.416,35.154 62.103,35.154 52.451,44.806 42.951,44.806 39.103,48.654 39.345,48.895 39.345,78.524 44.094,78.524 45.479,79.908
GND on Int1 (GND) "Int1 (GND)-GND" (solid, pour order 50): 21.717,5.334 102.362,5.334 100.711,6.985 100.711,107.823 22.098,107.95 21.717,107.569

## Other copper
Int1 (GND):
  pour cut-out: 39.802,89.218 cw(c39.764,85.611) 39.726,82.004 cw(c39.764,85.611)
Int2 (PWR):
  pour cut-out: 39.802,89.217 cw(c39.758,85.611) 39.715,82.004 cw(c39.758,85.611)

## Silkscreen, mask and mechanical layers (free items; w line width, h text height)
Top Overlay:
  drawing of 3 lines, arcs and shapes, not listed
  text "1" at 31.623,61.531 h1.52 r270
  text "2" at 31.597,59.017 h1.52 r270
  text "3" at 31.728,56.577 h1.52 r270
  text "4" at 31.673,53.987 h1.52 r270
  text "5" at 31.55,51.383 h1.52 r270
  text "6" at 31.689,48.78 h1.52 r270
  text "8" at 31.677,46.252 h1.52 r270
  text "7" at 31.406,43.979 h1.52 r270
  text "RCIN" at 31.233,40.259 h1.52 r270
Mechanical 1:
  circle w0.013: c44.75,54.75 r1.55
  circle w0.013: c75.25,54.75 r1.55
  circle w0.013: c75.25,85.25 r1.55
  circle w0.013: c44.75,85.25 r1.55
  lines w0.013: 22.5,33.322 22.5,105 cw(c25,105) 25,107.5 95,107.5 ; 79.812,8.516 97.012,31.838 ccw(c95,33.322) 97.5,33.322 97.5,105

## Text inside footprints (layer, text, board x,y; h text height)
USB: Mechanical 13 "PCB EDGE" at 97.201,86.341 h0.61 r90